# Altium PCB 8051_ESP32CAM.PcbDoc
Units mil, origin at the board's own origin, x right, y up, seen from the top; angles counter-clockwise.
Board outline 6000 x 4000 mil, 2 copper layers (Top Layer, Bottom Layer); 37 components, 15 nets, 180 pads, 0 vias.
Unrouted connection lines stored in the file: 27.
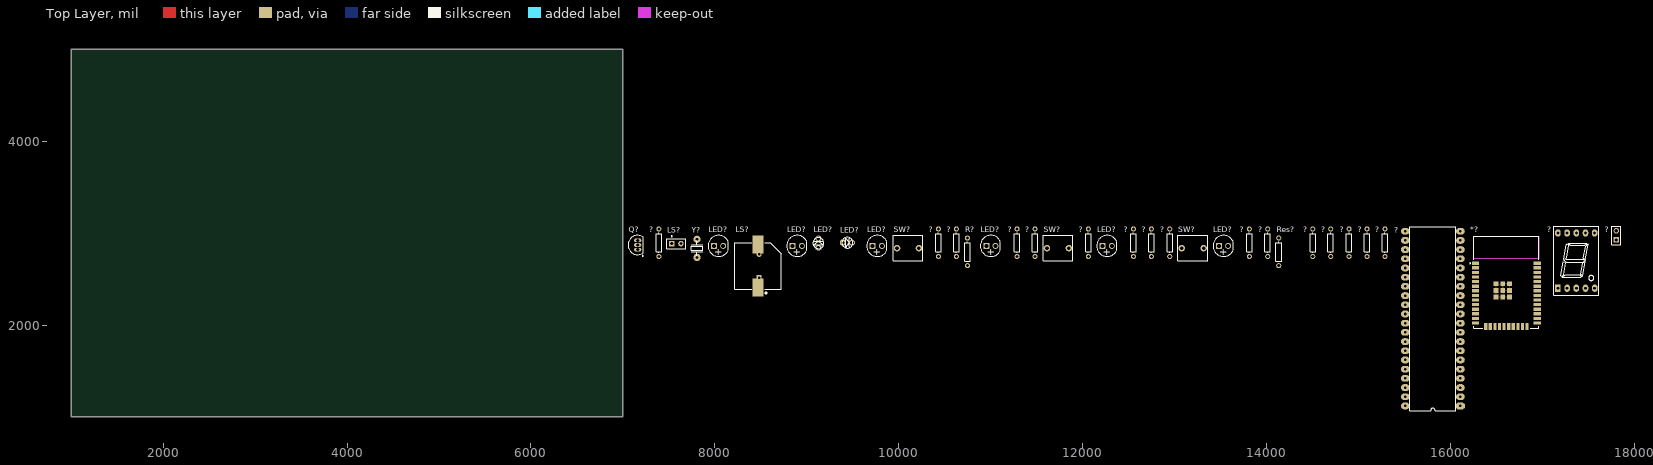
[diagram p0: Top Layer view]
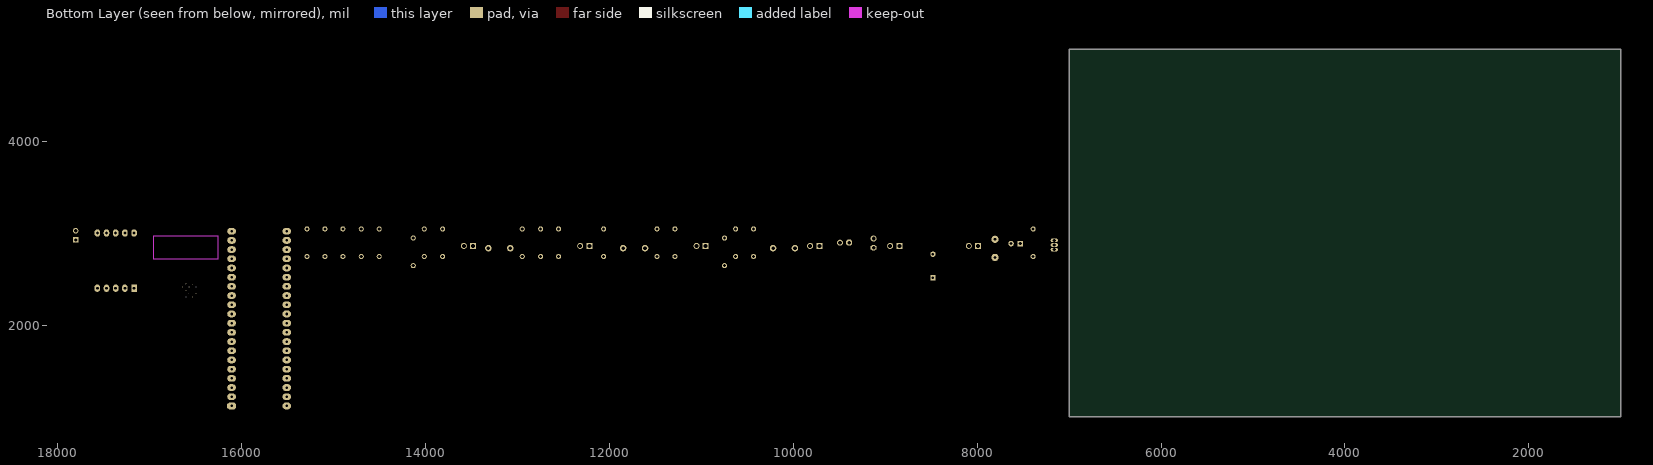
[diagram p1: Bottom Layer view, seen from below]

## Layer stack, top to bottom
Top Solder: solder mask 0.4, Solder Resist, Dk 3.5
Top Layer: signal copper 1.4
Dielectric 1: dielectric 12.6, FR-4, Dk 4.8
Bottom Layer: signal copper 1.4
Bottom Solder: solder mask 0.4, Solder Resist, Dk 3.5

## Board outline
1000,1000 7000,1000 7000,5000 1000,5000

## Design rules (kind name [scope] priority, off if disabled: settings)
Clearance [All] p1: gap=10 ignorepadtopadclearanceinfootprint=FALSE except(0: Arc-Hole Track-Hole SMDPad-Hole THPad-Hole Via-Hole Fill-Hole Poly-Hole Region-Hole Text-Hole)
PolygonConnect [All] p1: connectstyle=Relief reliefconductorwidth=10 reliefentries=4 polygonreliefangle="90 Angle" airgapwidth=10
RoomDefinition 8051_ESP32CAM [InComponentClass('8051_ESP32CAM')] p1: confinementstyle=ConfineIn formatcopy=TRUE lockcomponents=FALSE outline 7045,1060 17860,1060 17860,3085 7045,3085
RoutingVias [All] p1: holewidth=28 width=50 viastyle="Through Hole" minholewidth=28 minwidth=50 maxholewidth=28 maxwidth=50
SolderMaskExpansion [All] p1: expansion=4 istentingtop=FALSE
Width [All] p1: maxlimit=10 minlimit=10 preferedwidth=10
30 further rules are at their usual default settings.

## Classes and differential pairs
component class 8051_ESP32CAM: *? ? LED? LS? Q? R? Res? SW? Y?

## Components (designator, comment, footprint, x,y, rotation, side; value= is the part's Value field where it differs from the comment)
*? "ESP32 WROOM 32" ESP32-WROOM-32D 16605,2465 r0 top
? "Res7" AXIAL-0.3 14010,2895 r90 top value=1K
? "Header 2" HDR1X2 17800,2925 r90 top
? "LED 7 Thanh" "LED 7x1 0.56" 17360,2675 r0 top
? "Res9" AXIAL-0.3 12945,2895 r90 top value=1K
? "Res8" AXIAL-0.3 13810,2895 r90 top value=1K
? "Res11" AXIAL-0.3 12550,2895 r90 top value=1K
? "Res12" AXIAL-0.3 12060,2895 r90 top value=1K
? "Res1" AXIAL-0.3 15285,2895 r90 top value=1K
? "Res5" AXIAL-0.3 14500,2895 r90 top value=1K
? "Res13" AXIAL-0.3 11480,2895 r90 top value=1K
? "Res15" AXIAL-0.3 10625,2895 r90 top value=1K
? "Res2" AXIAL-0.3 15090,2895 r90 top value=1K
? "Res17" AXIAL-0.3 7390,2895 r90 top value=1K
? "Res16" AXIAL-0.3 10430,2895 r90 top value=1K
? "Res10" AXIAL-0.3 12745,2895 r90 top value=1K
? "Res14" AXIAL-0.3 11285,2895 r90 top value=1K
? "Res4" AXIAL-0.3 14695,2895 r90 top value=1K
? "AT89S8253" DIP40_ 16105,1120 r90 top
? "Res3" AXIAL-0.3 14895,2895 r90 top value=1K
LED? "LED" "LED_phi 5" 12265,2860 r0 top
LED? "LED" "LED_phi 5" 8895,2860 r0 top
LED? "LED" "LED_phi 5" 8040,2860 r0 top
LED? "LED 3mm" LED-3MM-GREEN 9125,2840 r90 top
LED? "LED" "LED_phi 5" 13530,2860 r0 top
LED? "LED" "LED_phi 5" 11000,2860 r0 top
LED? "LED" "LED_phi 5" 9765,2860 r0 top
LED? "LED 3mm" LED-3MM-RED 9390,2895 r0 top
LS? "Speaker" PIN2 7530,2885 r0 top
LS? "Buzzer" ABSM-1574 8470,2410 r90 top
Q? "NPN" TO-226-AA 7160,2870 r0 top
R? "Res1" AXIAL-0.3 10745,2795 r90 top value=1K
Res? "1K" AXIAL-0.3 14130,2795 r90 top
SW? "SW" SW-2P-S 11610,2935 r0 top value="SW chip 2 pin"
SW? "SW" SW-2P-S 13075,2935 r0 top value="SW chip 2 pin"
SW? "SW" SW-2P-S 9980,2935 r0 top value="SW chip 2 pin"
Y? "20MHz" XTAL 7805,2735 r90 top

## Footprints (in the part's own frame and the unit in brackets; to place one, negate y for a bottom-side part, rotate by r counter-clockwise, add the part's x,y. Pads: shape width x height; smd on the part's side, far side on the other; paste and mask are expansions set on the pad)
ABSM-1574 [mm] "Magnetic Transducer Buzzer"
  rect 5x3 smd: 1(0,0) 2(11.8,0)
  rect 1.5x1.5 hole 0.7: 1A(2.65,-0.24)
  round 1.5 hole 0.7: 2A(9.15,-0.24)
  silkscreen extent -1.83,-6.4 12.3,6.4
AXIAL-0.3 [mm] "Axial Device, Thru-Hole; 2 Leads; 0.3 in Pin Spacing"
  round 1.4 hole 0.85: 1(-3.81,0) 2(3.81,0)
  silkscreen extent -2.77,-0.76 2.77,0.76
DIP40_ [mm]
  oct 1.85x2.4 hole 0.7: 1(0,0)
  oval 1.85x2.4 hole 0.7: 2(2.54,0) 3(5.08,0) 4(7.62,0) 5(10.16,0) 6(12.7,0) 7(15.24,0) 8(17.78,0) 9(20.32,0) 10(22.86,0) 11(25.4,0) 12(27.94,0) 13(30.48,0) 14(33.02,0) 15(35.56,0) 16(38.1,0) 17(40.64,0) 18(43.18,0) 19(45.72,0) 20(48.26,0) 21(48.26,15.24) 22(45.72,15.24) 23(43.18,15.24) 24(40.64,15.24) 25(38.1,15.24) 26(35.56,15.24) 27(33.02,15.24) 28(30.48,15.24) 29(27.94,15.24) 30(25.4,15.24) 31(22.86,15.24) 32(20.32,15.24) 33(17.78,15.24) 34(15.24,15.24) 35(12.7,15.24) 36(10.16,15.24) 37(7.62,15.24) 38(5.08,15.24) 39(2.54,15.24) 40(0,15.24)
  silkscreen extent -1.27,1.27 49.53,13.97
ESP32-WROOM-32D [mm]
  rect 2x0.9 smd: 1(-8.5,5.26) 2(-8.5,3.99) 3(-8.5,2.72) 4(-8.5,1.45) 5(-8.5,0.18) 6(-8.5,-1.09) 7(-8.5,-2.36) 8(-8.5,-3.63) 9(-8.5,-4.9) 10(-8.5,-6.17) 11(-8.5,-7.44) 12(-8.5,-8.71) 13(-8.5,-9.98) 14(-8.5,-11.25) 25(8.5,-11.25) 26(8.5,-9.98) 27(8.5,-8.71) 28(8.5,-7.44) 29(8.5,-6.17) 30(8.5,-4.9) 31(8.5,-3.63) 32(8.5,-2.36) 33(8.5,-1.09) 34(8.5,0.18) 35(8.5,1.45) 36(8.5,2.72) 37(8.5,3.99) 38(8.5,5.26)
  rect 0.9x2 smd: 15(-5.715,-12.25) 16(-4.445,-12.25) 17(-3.175,-12.25) 18(-1.905,-12.25) 19(-0.635,-12.25) 20(0.635,-12.25) 21(1.905,-12.25) 22(3.175,-12.25) 23(4.445,-12.25) 24(5.715,-12.25)
  rect 1.33x1.33 smd: 39(-2.835,-4.075) 39(-2.835,-2.24) 39(-2.835,-0.405) 39(-1,-4.075) 39(-1,-2.24) 39(-1,-0.405) 39(0.835,-4.075) 39(0.835,-2.24) 39(0.835,-0.405)
  round 0.3 hole 0.2: 39(-2.835,-3.157) 39(-2.835,-1.322) 39(-1.917,-4.075) 39(-1.917,-2.24) 39(-1.917,-0.405) 39(-1,-3.157) 39(-1,-1.322) 39(-0.082,-4.075) 39(-0.082,-2.24) 39(-0.082,-0.405) 39(0.835,-3.157) 39(0.835,-1.322)
  Keep-Out Layer region: 9,6.45 -9,6.45 -9,12.75 9,12.75
  Keep-Out Layer region: 9,6.45 -9,6.45 -9,12.75 9,12.75
  silkscreen extent -10.1,-12.75 9,12.75, body extent -9,-12.62 9,12.88, height 3.2
HDR1X2 [mm] "Connector; Header; 2 Position"
  rect 1.5x1.5 hole 0.9: 1(0,0)
  round 1.5 hole 0.9: 2(2.54,0)
  silkscreen extent -1.27,-1.27 3.81,1.27
"LED 7x1 0.56" [mil]
  rect 60x80 hole 32: 1(-195,-275)
  oval 60x80 hole 32: 2(-95,-275) 3(5,-275) 4(105,-275) 5(205,-275) 6(205,325) 7(105,325) 8(5,325) 9(-95,325) 10(-195,325)
  silkscreen extent -239,-350 249,400, body extent -241,-349 251,399, height 315
LED-3MM-GREEN [mil]
  oct 65x65 hole 40: 1(0,0)
  round 65 hole 40: 2(100,0)
  silkscreen extent -9,-59 109,59, body extent -15,-70 112,60, height 182
LED-3MM-RED [mil]
  oct 65x65 hole 40: 1(0,0)
  round 65 hole 40: 2(100,0)
  silkscreen extent -9,-59 109,59, body extent -27,-77 117,80, height 181
"LED_phi 5" [mil] "LED phi 5mm"
  rect 65x65 hole 43.31: 1(-50,0)
  round 65 hole 43.31: 2(50,0)
  silkscreen extent -114,-114 104,114
PIN2 [mm] "Photosensitive Diode; 2 Leads"
  rect 1.5x1.5 hole 0.9: 1(0,0)
  round 1.5 hole 0.9: 2(2.54,0)
  silkscreen extent -1.4,-1.4 3.94,2.17
SW-2P-S [mm]
  round 1.8 hole 1: 1(0,-2.54) 2(6.045,-2.54)
  silkscreen extent -1.04,-6.02 7.14,1.02
TO-226-AA [mm] "TO, Flat Index; 3 In-Line, Axial Leads; Body Dia. 4.8mm; Leads 0.55 x 0.51 mm (max)"
  oval 2x1 hole 0.9: 1(0,-1.27) 2(0,0) 3(0,1.27)
  silkscreen extent -2.65,-3.13 1.52,2.65, body extent -2.65,-2.66 1.52,2.66, height 5.33
XTAL [mm]
  round 2 hole 0.762: 1(0,0) 2(5,0)
  silkscreen extent 0.51,-1.52 4.57,1.52

## Part data
? ? ? ? ? ? ? ? ? ? ? ? ? ? ? Res?: library part Res1, "Resistor", LatestRevisionDate=17-Jul-2002, LatestRevisionNote="Re-released for DXP Platform.", PackageDescription="Axial Device, Thru-Hole; 2 Leads; 0.3 in Pin Spacing", PackageReference=AXIAL-0.3, Published=8-Jun-2000, Publisher="Altium Limited"
?: "Header, 2-Pin", LatestRevisionDate=17-Jul-2002, LatestRevisionNote="Re-released for DXP Platform.", Publisher="Altium Limited"
?: library part "LED 7x1 0.56 Anot", "Dán", Chung_Loai=Dán, Don_Vi=Con, Ma_Hang=MH000834, Ten_Linh_Kien="Led 7 0.56 1 Số Anot (Sáng Đỏ)"
? R?: "Resistor", LatestRevisionDate=17-Jul-2002, LatestRevisionNote="Re-released for DXP Platform.", PackageDescription="Axial Device, Thru-Hole; 2 Leads; 0.3 in Pin Spacing", PackageReference=AXIAL-0.3, Published=8-Jun-2000, Publisher="Altium Limited"
LED? LED? LED? LED? LED? LED?: library part "LED_phi 5"
LED?: library part "LED 3mm Xanh La", "Cắm", Chung_Loai=Cắm, Don_Vi=Con, Ma_Hang=MH001054, Ten_Linh_Kien="Led 3MM Phủ Xanh (10c)"
LED?: library part "LED 3mm Do", "Cắm", Chung_Loai=Cắm, Don_Vi=Con, Ma_Hang=MH003892, Ten_Linh_Kien="Led 3MM Phủ Đỏ (10c)"
LS?: "Loudspeaker", LatestRevisionDate=17-Jul-2002, LatestRevisionNote="Re-released for DXP Platform.", PackageReference=PIN2, Published=24-Mar-1999, Publisher="Altium Limited"
LS?: "Magnetic Transducer Buzzer", ComponentLink1Description="Manufacturer Link", ComponentLink1URL=http://www.megastar.com/linecard/buzzmode/index.php, DatasheetVersion=17-Dec-2003, LatestRevisionDate=17-Dec-2003, LatestRevisionNote="Schematic revised, PCB Footprint replaced.", PackageDescription="Magnetic Transducer Buzzer", PackageReference=ABSM-1574, Published=24-Mar-1999, Publisher="Altium Limited"
Q?: "NPN Bipolar Transistor", Code_JEDEC=TO-226-AA, LatestRevisionDate=17-Jul-2002, LatestRevisionNote="Re-released for DXP Platform.", PackageDescription="TO, Flat Index; 3 In-Line, Axial Leads; Body Dia. 4.8mm; Leads 0.55 x 0.51 mm (max)", PackageReference=TO-226-AA, Published=8-Jun-2000, Publisher="Altium Limited"
SW? SW? SW?: library part SW2, "Switch button 2 pin"
Y?: library part XTAL_1, "Crystal Oscillator", LatestRevisionDate=17-Jul-2002, LatestRevisionNote="Re-released for DXP Platform.", PackageReference=R38, Published=8-Jun-2000, Publisher="Altium Limited"

## Nets (pads, with @x,y where several pads share a name; then routed paths per layer and width w, separated by ;. In a path a pad name is that pad's centre, name@x,y a point inside that pad or via, vN(x,y) a via of type N, cw(c..) or ccw(c..) an arc to the next point about the centre after c; other vN are vias at no path point)
GND: LED?.2 Q?.3 R?.1 SW?.1
Net*?_1: *?.1 ?.1@17800,2925
Net*?_2: *?.2 ?.2@17800,3025
Net*?_34: *?.34 ?.11
Net*?_35: *?.35 ?.10@16105,2020
Net?_1: ?.1@10625,2745 ?.27
Net?_2: ?.2@11480,3045 LED?.1@8845,2860
Net?_6: ?.6@16105,1620 Res?.2
Net?_9: ?.9@17265,3000 Res?.1
Net?_12: ?.12 SW?.2@13313,2835
Net?_13: ?.13 SW?.2@11848,2835
Net?_14: ?.14 R?.2 SW?.2@10218,2835
Net?_15: ?.15 LS?.1@8470,2410 LS?.1A
NetLS?_1: LS?.1@7530,2885 Y?.2
NetLS?_2: LS?.2@7630,2885 Q?.1
pads on no net: *?.3 *?.4 *?.5 *?.6 *?.7 *?.8 *?.9 *?.10 *?.11 *?.12 *?.13 *?.14 *?.15 *?.16 *?.17 *?.18 *?.19 *?.20 *?.21 *?.22 *?.23 *?.24 *?.25 *?.26 *?.27 *?.28 *?.29 *?.30 *?.31 *?.32 *?.33 *?.36 *?.37 *?.38 *?.39 ?.1@7390,2745 ?.1@10430,2745 ?.1@11285,2745 ?.1@11480,2745 ?.1@12060,2745 ?.1@12550,2745 ?.1@12745,2745 ?.1@12945,2745 ?.1@13810,2745 ?.1@14010,2745 ?.1@14500,2745 ?.1@14695,2745 ?.1@14895,2745 ?.1@15090,2745 ?.1@15285,2745 ?.1@16105,1120 ?.1@17165,2400 ?.2@7390,3045 ?.2@10430,3045 ?.2@10625,3045 ?.2@11285,3045 ?.2@12060,3045 ?.2@12550,3045 ?.2@12745,3045 ?.2@12945,3045 ?.2@13810,3045 ?.2@14010,3045 ?.2@14500,3045 ?.2@14695,3045 ?.2@14895,3045 ?.2@15090,3045 ?.2@15285,3045 ?.2@16105,1220 ?.2@17265,2400 ?.3 ?.4 ?.5 ?.6@17565,3000 ?.7 ?.8 ?.9@16105,1920 ?.10@17165,3000 ?.16 ?.17 ?.18 ?.19 ?.20 ?.21 ?.22 ?.23 ?.24 ?.25 ?.26 ?.28 ?.29 ?.30 ?.31 ?.32 ?.33 ?.34 ?.35 ?.36 ?.37 ?.38 ?.39 ?.40 LED?.1@7990,2860 LED?.1@9125,2840 LED?.1@9390,2895 LED?.1@9715,2860 LED?.1@10950,2860 LED?.1@12215,2860 LED?.1@13480,2860 LS?.2@8470,2874.57 LS?.2A Q?.2 Y?.1

## Text inside footprints (layer, text, board x,y; h text height)
*?: Mechanical 13 "ANTENNA" at 16368.78,2819.33 h70
LED?: Top Overlay "+" at 13483,2757 h80
LED?: Top Overlay "+" at 12218,2757 h80
LED?: Top Overlay "+" at 10953,2757 h80
LED?: Top Overlay "+" at 9718,2757 h80
LED?: Top Overlay "+" at 8848,2757 h80
LED?: Top Overlay "+" at 7993,2757 h80